# Altium PCB PCB1.PcbDoc
Units mm, origin at the board's own origin, x right, y up, seen from the top; angles counter-clockwise.
Board outline 115.6 x 39.89 mm, 2 copper layers (Top Layer, Bottom Layer); 18 components, 13 nets, 63 pads, 0 vias.
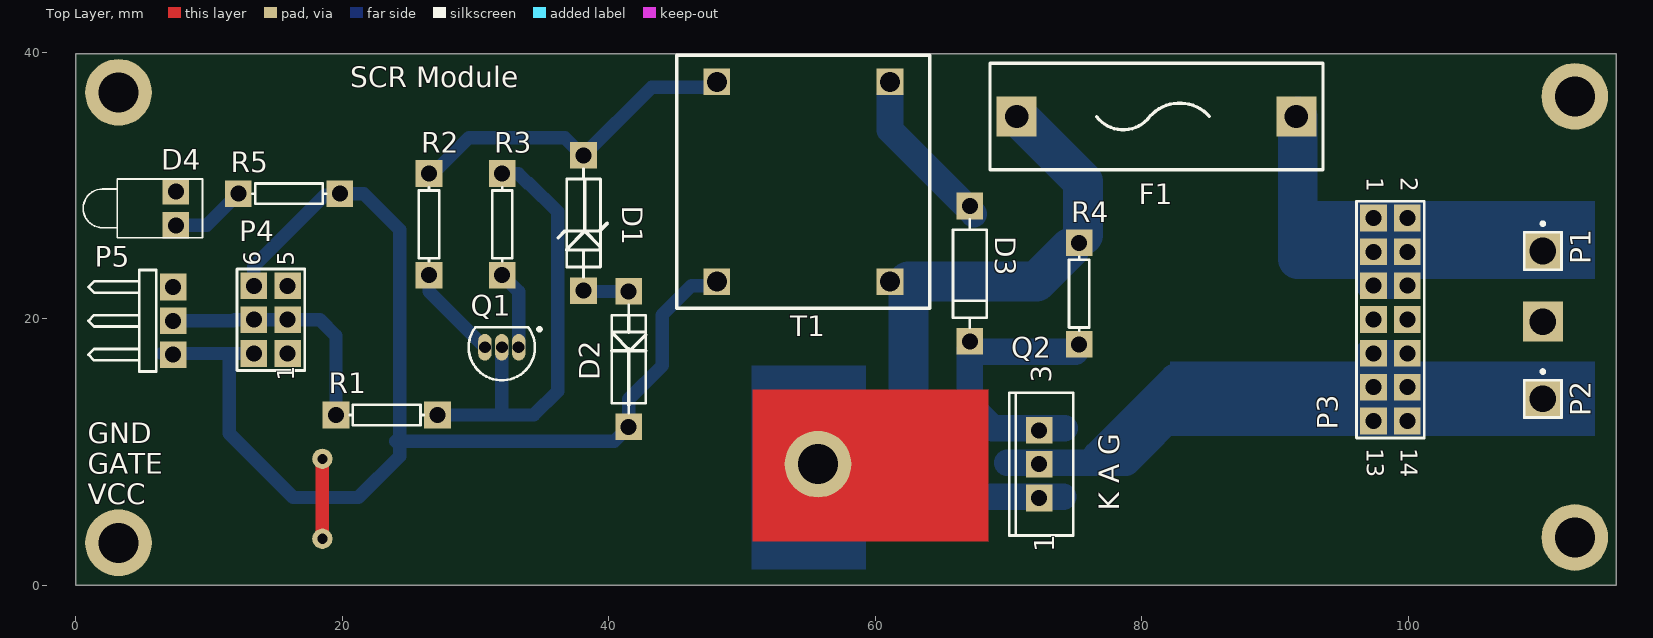
[diagram p0: Top Layer view]
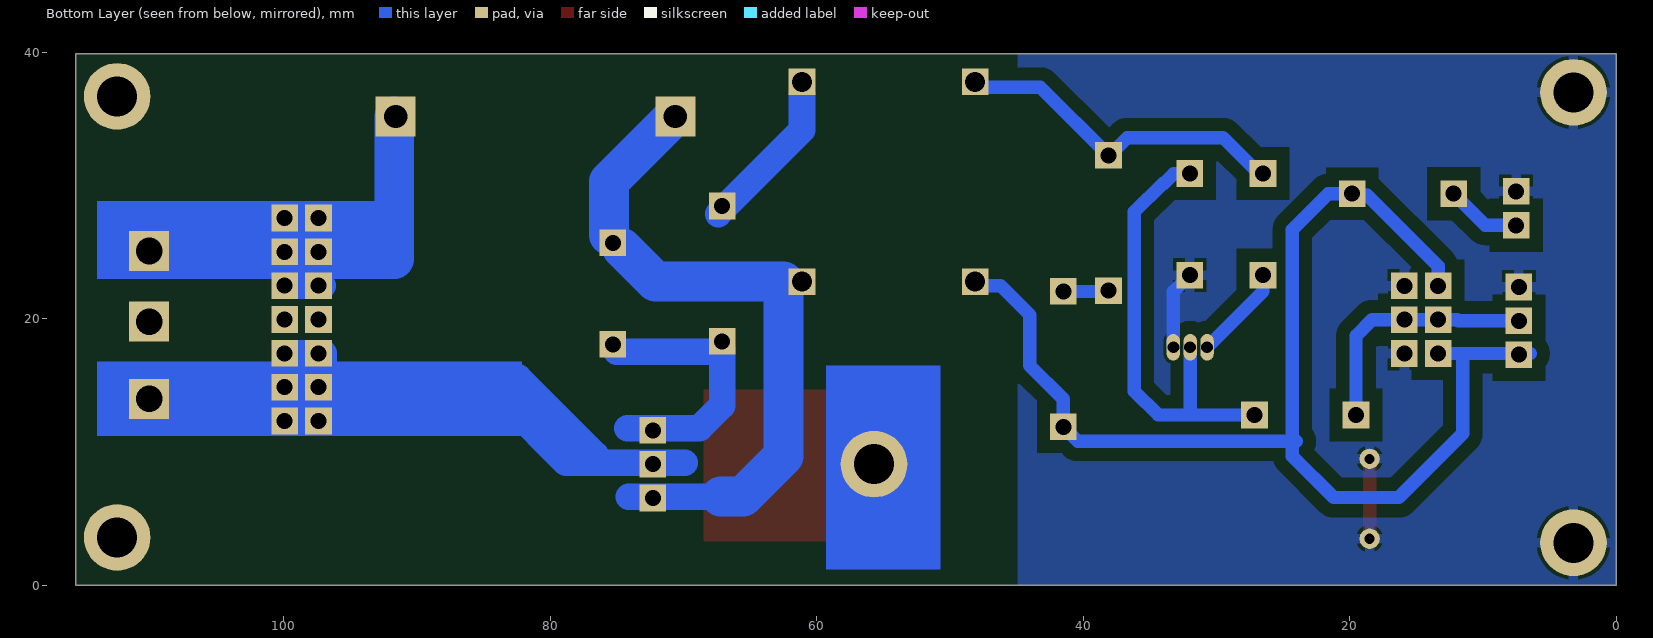
[diagram p1: Bottom Layer view, seen from below]

## Layer stack, top to bottom
Top Solder: solder mask 0.0102, Solder Resist, Dk 3.5
Top Layer: signal copper 0.0356
Dielectric 1: dielectric 0.32, FR-4, Dk 4.8
Bottom Layer: signal copper 0.0356
Bottom Solder: solder mask 0.0102, Solder Resist, Dk 3.5

## Board outline
0,0 115.6,0 115.6,39.893 0,39.893

## Design rules (kind name [scope] priority, off if disabled: settings)
Clearance Clearance_2 [(InPoly AND InNet('GND'))] p1: gap=1 ignorepadtopadclearanceinfootprint=FALSE
Clearance Clearance_1 [All] p2: gap=0.254 ignorepadtopadclearanceinfootprint=FALSE except(0: Arc-Hole Track-Hole SMDPad-Hole THPad-Hole Via-Hole Fill-Hole Poly-Hole Region-Hole Text-Hole)
PlaneConnect PlaneConnect_1 [All] p1: planeconnectstyle=Relief reliefexpansion=0.508 reliefentries=4 reliefconductorwidth=0.254 reliefairgap=0.254
PolygonConnect [All] p1: connectstyle=Relief reliefconductorwidth=0.75 reliefentries=4 polygonreliefangle="90 Angle" airgapwidth=0.254
RoomDefinition Sheet2 [InComponentClass('Sheet2')] p1: confinementstyle=ConfineIn formatcopy=TRUE lockcomponents=FALSE outline -1.3,-1.4 115.5,-1.4 115.5,40.7 -1.3,40.7
RoutingVias [All] p1: holewidth=0.711 width=1.27 viastyle="Through Hole" minholewidth=0.711 minwidth=1.27 maxholewidth=0.711 maxwidth=1.27
SolderMaskExpansion [All] p1: expansion=0.102
Width [All] p1: maxlimit=4 minlimit=0.254 preferedwidth=1
29 further rules are at their usual default settings.

## Components (designator, comment, footprint, x,y, rotation, side; value= is the part's Value field where it differs from the comment)
D1 "4V7" DIODE-0.4 41.491,16.985 r90 top
D2 "1N4007" DIODE-0.4 38.1,27.2 r270 top
D3 "1N4007" DIODE-0.4 67.1,23.4 r270 top
D4 "LED0" LED-1 7.5,28.3 r180 top
F1 "" Fusivel 68.604,35.194 r0 top
P1 "" PIN1 110.1,25.1 r0 top
P2 "" PIN1 110.1,14 r0 top
P3 "Header 7X2" HDR2X7 97.389,27.574 r270 top
P4 "Header 3X2" HDR2X3 15.9,17.4 r90 top
P5 "Header 3H" HDR1X3H 7.3,22.4 r270 top
Q1 "2N3904" TO-92A 31.966,17.874 r90 top
Q2 "TIC106" TO-220-AB 72.3,9.1 r90 top
R1 "Res1" AXIAL-0.3 23.33,12.794 r180 top value=110
R2 "Res1" AXIAL-0.3 26.5,27.1 r90 top value=220
R3 "Res1" AXIAL-0.3 32,27.1 r90 top value=10K
R4 "Res1" AXIAL-0.3 75.3,21.9 r90 top value=10K
R5 "Res1" AXIAL-0.3 16,29.4 r180 top value=10K
T1 "SKPT17" TRAFOSKPT17 47.1,22.8 r0 top

## Footprints (in the part's own frame and the unit in brackets; to place one, negate y for a bottom-side part, rotate by r counter-clockwise, add the part's x,y. Pads: shape width x height; smd on the part's side, far side on the other; paste and mask are expansions set on the pad)
AXIAL-0.3 [mm] "Axial Device, Thru-Hole; 2 Leads; 0.3 in Pin Spacing"
  rect 2x2 hole 1.2: 1(-3.81,0) 2(3.81,0)
  silkscreen extent -2.77,-0.76 2.77,0.76
DIODE-0.4 [mm] "Diode, Thru-Hole; 2 Leads; 0.4 in Pin Spacing"
  rect 2x2 hole 1.2: 1(-5.08,0) 2(5.08,0)
  silkscreen extent -4.06,-1.27 4.06,1.27
Fusivel [mm]
  rect 3x3 hole 1.75: 1(2,0) 2(23,0)
  silkscreen extent 0,-4 25,4, body extent 0,-4 25,4, height 20
HDR1X3H [mm] "Connector; Header; 3 Position; Right Angle"
  rect 2x2 hole 1.2: 1(0,0) 2(2.54,0) 3(5.08,0)
  silkscreen extent -1.27,-6.35 6.35,-1.27
HDR2X3 [mm] "Connector; Header; 3x2 Position"
  rect 2x2 hole 1.2: 1(0,0) 2(0,2.54) 3(2.54,0) 4(2.54,2.54) 5(5.08,0) 6(5.08,2.54)
  silkscreen extent -1.27,-1.27 6.35,3.81
HDR2X7 [mm] "Connector; Header; 7x2 Position"
  rect 2x2 hole 1.2: 1(0,0) 2(0,2.54) 3(2.54,0) 4(2.54,2.54) 5(5.08,0) 6(5.08,2.54) 7(7.62,0) 8(7.62,2.54) 9(10.16,0) 10(10.16,2.54) 11(12.7,0) 12(12.7,2.54) 13(15.24,0) 14(15.24,2.54)
  silkscreen extent -1.27,-1.27 16.51,3.81
LED-1 [mm] "LED; 2 Leads"
  rect 2x2 hole 1.2: 1(0,1.27) 2(0,-1.27)
  silkscreen extent -2,-2.2 6.95,2.2
PIN1 [mm] "Connector; Plug"
  rect 3x3 hole 2: 1(0,0)
  silkscreen extent -1.4,-1.4 1.4,2.17
TO-92A [mm] "TO, Flat Index; 3 In-Line, Axial Leads; Body Dia. 4.5mm; Leads 0.51 x 0.48 mm (max)"
  oval 2x1 hole 0.9: 1(0,-1.27) 2(0,0) 3(0,1.27)
  silkscreen extent -2.48,-2.96 1.5,2.48, body extent -2.48,-2.5 1.5,2.5, height 6.86
TO-220-AB [mm] "TO, Thru-Hole, Vertical, Heatsink Mounted; 3 In-Line Leads; Pitch 2.54 mm"
  rect 2x2 hole 1.2: 1(-2.54,0) 2(0,0) 3(2.54,0)
  silkscreen extent -5.35,-2.55 5.35,2.25
TRAFOSKPT17 [mm]
  rect 2x2 hole 1.5: 1(1,0) 2(1,15) 3(14,0) 4(14,15)
  silkscreen extent -2,-2 17,17, body extent -2,-2 17,17, height 14

## Part data
D1: library part "D Zener", "Zener Diode", LatestRevisionDate=17-Jul-2002, LatestRevisionNote="Re-released for DXP Platform.", PackageDescription="Diode, Thru-Hole; 2 Leads; 0.7 in Pin Spacing", PackageReference=DIODE-0.7, Published=8-Jun-2000, Publisher="Altium Limited"
D2 D3: library part Diode, "Default Diode", Code_JEDEC=DO-214-AB, LatestRevisionDate=17-Jul-2002, LatestRevisionNote="Re-released for DXP Platform.", PackageDescription="DO-214-AB/SMC; 2 C-Bend Leads; Body 7.9 x 5.9 mm, inc. leads (LxW)", PackageReference=SMC, PackageVersion=Sep-1996, Published=8-Jun-2000, Publisher="Altium Limited"
D4: "Typical INFRARED GaAs LED", LatestRevisionDate=08-Jul-2005, LatestRevisionNote="Mech Layer 1 removed.", PackageDescription="LED; 2 Leads", PackageReference=LED-0, Published=8-Jun-2000, Publisher="Altium Limited"
F1: library part "Fuse 2", "Fuse", LatestRevisionDate=17-Jul-2002, LatestRevisionNote="Re-released for DXP Platform.", PackageDescription="Thru-Hole; 2 Leads", PackageReference=PIN-W2/E2.8, Published=8-Jun-2000, Publisher="Altium Limited"
P1 P2: library part Plug, "Plug", LatestRevisionDate=17-Jul-2002, LatestRevisionNote="Re-released for DXP Platform.", Publisher="Altium Limited"
P3: "Header, 7-Pin, Dual row", LatestRevisionDate=17-Jul-2002, LatestRevisionNote="Re-released for DXP Platform.", Publisher="Altium Limited"
P4: "Header, 3-Pin, Dual row", LatestRevisionDate=17-Jul-2002, LatestRevisionNote="Re-released for DXP Platform.", Publisher="Altium Limited"
P5: "Header, 3-Pin, Right Angle", LatestRevisionDate=17-Jul-2002, LatestRevisionNote="Re-released for DXP Platform.", Publisher="Altium Limited"
Q1: "NPN General Purpose Amplifier", ComponentLink1Description="Manufacturer Link", ComponentLink1URL=http://www.fairchildsemi.com/, ComponentLink2Description=Datasheet, ComponentLink2URL=http://www.fairchildsemi.com/ds/2N%2F2N3904.pdf, DatasheetVersion=1997, LatestRevisionDate=15-Jan-2003, LatestRevisionNote="PCB Footprint 'BCY-W3/D4.7' replaced", PackageDescription="TO, Flat Index; 3 In-Line, Axial Leads; Body Dia. 4.5mm; Leads 0.51 x 0.48 mm (max)", PackageReference=TO-92A, PackageVersion=Sep-1998, Published=8-Jun-2000, Publisher="Altium Limited"
Q2: library part SCR, "Silicon Controlled Rectifier", Code_JEDEC=TO-220-AB, LatestRevisionDate=17-Jul-2002, LatestRevisionNote="Re-released for DXP Platform.", PackageReference=TO-220-AB, Published=8-Jun-2000, Publisher="Altium Limited"
R1 R2 R3 R4 R5: "Resistor", LatestRevisionDate=17-Jul-2002, LatestRevisionNote="Re-released for DXP Platform.", PackageDescription="Axial Device, Thru-Hole; 2 Leads; 0.3 in Pin Spacing", PackageReference=AXIAL-0.3, Published=8-Jun-2000, Publisher="Altium Limited"
T1: library part Trans, "Transformer", LatestRevisionDate=08-Jul-2005, LatestRevisionNote="Mech Layer 1 removed.", PackageDescription="Transformer; 4 Leads", PackageReference=TRANS, Published=24-Mar-1999, Publisher="Altium Limited"

## Free pads (board coordinates)
  round 5 hole 3: 2(3.2,3.2) 2(3.2,37) 2(55.7,9.1) 2(112.5,3.6) 2(112.5,36.7)
  round 1.524 hole 0.762: 3(18.5,9.5) 4(18.5,3.5)
  rect 3x3 hole 2: 5(110.1,19.8)

## Nets (pads, with @x,y where several pads share a name; then routed paths per layer and width w, separated by ;. In a path a pad name is that pad's centre, name@x,y a point inside that pad or via, vN(x,y) a via of type N, cw(c..) or ccw(c..) an arc to the next point about the centre after c; other vN are vias at no path point)
GND: D4.2 P4.1 P4.5 P5.1 pad.2@3.2,3.2 pad.2@3.2,37 pad.3 pad.4 Q1.1 R3.1 | length 11.9
  Top Layer w1: pad.4 pad.3
  Bottom Layer w1: R3.1 33.236,22.054 Q1.1
NetD1_2: D1.2 D2.2 | length 3.4
  Bottom Layer w1: D2.2 38.1,22.065 D1.2
NetD2_1: D2.1 R2.2 T1.2 | length 25.1
  Bottom Layer w1: R2.2@26.5,30.6 29.5,33.6 36.7,33.6 D2.1@38.05,32.25 ; D2.1 43.22,37.4 T1.2@47.7,37.4
NetD3_1: D3.1 T1.4 | length 11.5
  Bottom Layer w2: 61.1,36.8 61.1,34.18 D3.1@67.4,27.88
NetD3_2: D3.2 Q2.3 R4.1 | length 19.9
  Bottom Layer w0.254: D3.2@67.1,17.541 D3.2@67.596,17.541
  Bottom Layer w2: D3.2@67.1,17.72 67.1,17.541 67.1,13.5 68.8,11.8 74.2,11.8 ; D3.2@67.596,17.541 R4.1@75,17.541
NetD4_1: D4.1 R5.2 | length 5.7
  Bottom Layer w1: D4.1 9.82,27.03 R5.2
NetF1_1: F1.1 Q2.1 R4.2 T1.3 | length 52
  Bottom Layer w1: F1.1@70.104,35.194 F1.1@70.136,35.162
  Bottom Layer w2: 67.2,6.66 74.1,6.66 ; F1.1@70.136,35.162 F1.1@70.738,35.162 ; R4.2@74.6,25.31 R4.2@75.6,26.31
  Bottom Layer w3: 67.2,6.66 65.54,6.66 62.5,9.7 62.5,22.8 72.09,22.8 R4.2@74.6,25.31 ; F1.1@70.738,35.162 75.6,30.3 R4.2@75.6,26.31
NetF1_2: F1.2 P1.1 P3.1 P3.2 P3.3 P3.4 P3.5 P3.6 | length 23.4
  Bottom Layer w2: P3.5@97.089,22.494 99.629,22.494 P3.4@99.629,25.034 ; P3.3@97.089,25.034 P3.4@99.629,25.034 ; P3.1@97.089,27.574 99.629,27.574 P3.4@99.629,25.034
  Bottom Layer w3: 91.704,24.5 F1.2@91.704,35.194
NetP2_1: P2.1 P3.9 P3.10 P3.11 P3.12 P3.13 P3.14 Q2.2 | length 41.3
  Bottom Layer w1: 83.217,13.604 83.217,13.858
  Bottom Layer w2: 69.9,9.2 78.813,9.2 83.217,13.604 ; 76.6,9.8 82.4,15.6 ; 92.417,13.858 95.973,13.858 96.989,14.874 96.989,17.414 97.089,17.414 99.529,17.414 99.529,12.334 97.089,12.334 P3.13@96.989,12.334
NetP4_3: P4.3 P4.4 P5.2 R1.2 | length 18.7
  Bottom Layer w1: P5.2 11.851,19.86 11.931,19.94 P4.4 P4.3 18.32,19.94 19.52,18.74 R1.2
NetQ1_2: Q1.2 R1.1 R3.2 | length 33.5
  Bottom Layer w1: R1.1 34.379,12.794 36.157,14.572 36.157,28.034 33.998,30.193 33.907,30.193 33.19,30.91 R3.2 ; 31.966,12.921 Q1.2
NetQ1_3: Q1.3 R2.1 | length 6.8
  Bottom Layer w1: R2.1@26.5,22.954 26.5,22.07 Q1.3
VCC: D1.1 P4.2 P4.6 P5.3 R5.1 T1.1 | length 93.7
  Bottom Layer w1: P5.3@6.447,17.4 P5.3@7.38,17.4 ; P5.3 P5.3@7.38,17.4 ; P4.2 11.5,17.4 ; P4.6 13.36,23.96 18.681,29.281 R5.1@19.644,29.281 ; R5.1 21.6,29.4 24.3,26.7 24.3,10.81 ; 24,10.81 24.3,10.81 ; T1.1@47.7,22.5 46.2,22.5 44,20.3 44,16.5 41.491,13.991 D1.1 40.396,10.81 24.3,10.81 ; P5.3@7.38,17.4 11.5,17.4 ; 11.5,17.4 11.5,11.4 16.3,6.6 21.2,6.6 24.3,9.7 24.3,10.81
pads on no net: P3.7 P3.8

## Polygon pours and split planes (outlines as drawn)
GND on Bottom Layer "Bottom Layer-No Net" (solid, remove dead copper, pour order 0): 0,39.893 0,0 44.9,0 44.9,39.893 33.9,39.893

## Other copper
Top Layer:
  rectangle: 50.8,3.3 68.5,14.7
Bottom Layer:
  rectangle: 50.7,1.2 59.3,16.5
  rectangle net NetF1_2: 91.6,23 114,28.844
  rectangle net NetP2_1: 82.1,11.21 114,16.8

## Silkscreen, mask and mechanical layers (free items; w line width, h text height)
Top Overlay:
  lines w0.254: 36.2,26.1 36.7,26.6 36.83,26.6 38.2,26.6 ; 36.83,25.168 36.83,25.23 38.2,26.6 ; 38.1,23.898 38.1,25.168 ; 38.2,30.402 38.2,26.6 ; 39.37,25.168 39.37,25.43 38.2,26.6 ; 39.9,27.2 39.3,26.6 38.2,26.6 ; 40.221,17.6 42.761,17.6 ; 40.3,18.8 40.4,18.8 41.5,17.7 ; 41.5,13.509 41.5,17.7 ; 41.5,17.756 41.5,17.7 ; 41.5,19 41.5,20.278 ; 42.761,18.8 41.661,17.7 41.5,17.7
  text "SCR Module" at 20.6,37.4 h1.52
  text "GND / GATE / VCC" at 0.9,6.1 h1.52
  text "K A G" at 78.3,5.6 h1.52 r90
Mechanical 13:
  lines w0.254: 0.1,0.1 115.5,0.1 115.5,40 0.1,40 0.1,0.1 ; 0.1,0.1 0.1,0.1

## Text inside footprints (layer, text, board x,y; h text height)
P3: Top Overlay "13" at 96.881,10.302 h1.27 r270; Top Overlay "14" at 99.421,10.302 h1.27 r270; Top Overlay "1" at 96.881,30.622 h1.27 r270; Top Overlay "2" at 99.421,30.622 h1.27 r270
P4: Top Overlay "1" at 16.408,15.368 h1.27 r90; Top Overlay "5" at 16.408,24.004 h1.27 r90; Top Overlay "6" at 13.868,24.004 h1.27 r90
Q2: Top Overlay "3" at 73.189,15.196 h1.5 r90; Top Overlay "1" at 73.443,2.496 h1.5 r90